# Altium PCB Backplane.PcbDoc (part 3 of 3)
Units mil, origin at the board's own origin, x right, y up, seen from the top; angles counter-clockwise.
Board outline 16600 x 5110.24 mil, 4 copper layers (Component Side, Signal Layer 2, Signal Layer 1, Solder Side), stack 33.234 mil thick; 44 components, 199 nets, 1072 pads, 16 vias.
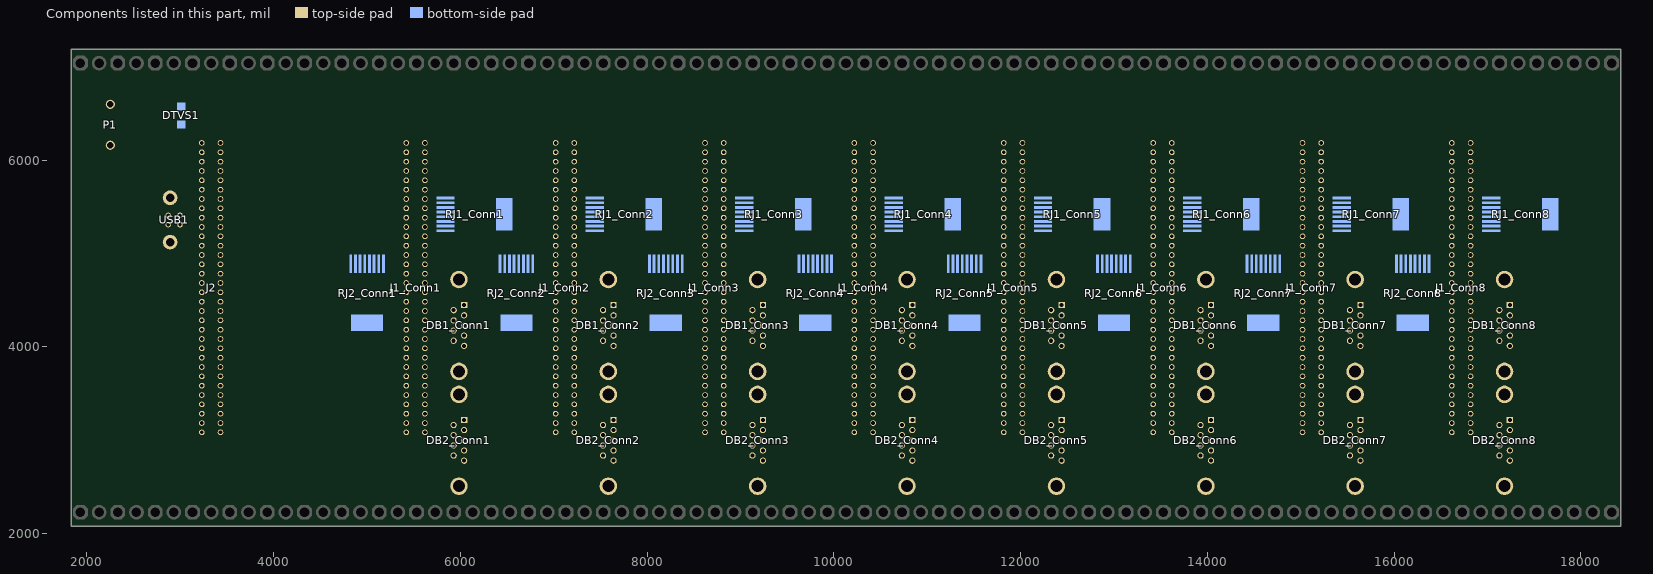
[diagram p5: the components of this part, seen from the top]

## Polygon pours and split planes (outlines as drawn) (continued)
+5VB_Conn8 on Component Side "Component Side-No Net 2" (solid, pour order 3671): 16547.88,4045.32 16897.88,4045.32 16967.88,4115.31 16967.88,4345.31 17067.88,4445.31 17187.88,4445.31 17187.88,4275.31 17287.88,4275.31 17287.88,4505.31 16957.88,4505.31 16887.88,4435.31 16877.88,4425.31 16877.88,4235.31 16547.88,4235.31
+5VGNDB_Conn8 on Component Side "Component Side-No Net 2" (solid, pour order 3691): 16547.88,3835.32 16887.88,3835.31 17067.88,4015.32 17067.88,4235.31 17177.88,4235.31 17177.88,4435.31 17077.88,4435.31 16977.88,4335.31 16977.88,4105.32 16907.88,4035.32 16547.88,4035.32
-5VGNDB_Conn8 on Component Side "Component Side-No Net 2" (solid, pour order 3644): 17077.88,4225.31 17177.88,4225.31 17177.88,3995.32 16917.88,3735.32 16547.88,3735.32 16547.88,3825.31 16897.88,3825.31 17077.88,4005.32
-5VB_Conn8 on Component Side "-5VB_CONN8_L01_P3650" (solid, pour order 3650): 17187.88,4165.31 17287.88,4165.31 17287.88,3965.32 16957.88,3635.32 16547.88,3635.32 16547.88,3725.32 16927.88,3725.32 17187.88,3985.32
-5VA_Conn8 on Component Side "Component Side-No Net 2" (solid, pour order 3655): 16547.88,3035.32 16787.88,3035.32 16977.88,2845.32 16977.88,2705.32 17027.88,2655.31 17307.88,2655.32 17307.88,2940.31 17307.88,2945.31 17188.16,2945.31 17187.88,2735.32 17067.88,2735.32 17067.61,2895.59 16837.88,3125.31 16548.2,3125.31
+5VA_Conn8 on Component Side "Component Side-No Net 2" (solid, pour order 3678): 17187.88,3045.32 17287.88,3045.32 17287.88,3235.32 17057.88,3465.32 16907.88,3615.32 16547.88,3615.32 16547.88,3435.32 16897.88,3435.31 17187.88,3145.31
+5VGNDA_Conn8 on Component Side "Component Side-No Net 2" (solid, pour order 3661): 17177.88,3015.32 17177.88,3135.32 16887.88,3425.32 16547.88,3425.31 16547.88,3245.31 16867.88,3245.32 17097.88,3015.32
-5VGNDA_Conn8 on Component Side "Component Side-No Net 2" (solid, pour order 3633): 17177.88,2765.32 17077.88,2765.31 17077.88,2905.32 17027.88,2955.32 16847.88,3135.32 16547.88,3135.31 16547.88,3225.31 16857.88,3225.32 17077.88,3005.32 17087.88,2995.32 17177.88,2995.32
+5VB_Conn7 on Component Side "Component Side-No Net 2" (solid, pour order 3670): 14947.88,4045.32 15297.88,4045.32 15367.88,4115.31 15367.88,4345.31 15467.88,4445.31 15587.88,4445.31 15587.88,4275.31 15687.88,4275.31 15687.88,4505.31 15357.88,4505.31 15287.88,4435.31 15277.88,4425.31 15277.88,4235.31 14947.88,4235.31
+5VGNDB_Conn7 on Component Side "Component Side-No Net 2" (solid, pour order 3685): 14947.88,3835.32 15287.88,3835.31 15467.88,4015.32 15467.88,4235.31 15577.88,4235.31 15577.88,4435.31 15477.88,4435.31 15377.88,4335.31 15377.88,4105.32 15307.88,4035.32 14947.88,4035.32
-5VGNDB_Conn7 on Component Side "Component Side-No Net 2" (solid, pour order 3639): 15477.88,4225.31 15577.88,4225.31 15577.88,3995.32 15317.88,3735.32 14947.88,3735.32 14947.88,3825.31 15297.88,3825.31 15477.88,4005.32
-5VB_Conn7 on Component Side "Component Side-No Net 2" (solid, pour order 3649): 15587.88,4165.31 15687.88,4165.31 15687.88,3965.32 15357.88,3635.32 14947.88,3635.32 14947.88,3725.32 15327.88,3725.32 15587.88,3985.32
-5VA_Conn7 on Component Side "Component Side-No Net 2" (solid, pour order 3654): 14947.88,3035.32 15187.88,3035.32 15377.88,2845.32 15377.88,2705.32 15427.88,2655.31 15707.88,2655.32 15707.88,2940.31 15707.88,2945.31 15588.16,2945.31 15587.88,2735.32 15467.88,2735.32 15467.61,2895.59 15237.88,3125.31 14948.2,3125.31
+5VA_Conn7 on Component Side "Component Side-No Net 2" (solid, pour order 3679): 15587.88,3045.32 15687.88,3045.32 15687.88,3235.32 15457.88,3465.32 15307.88,3615.32 14947.88,3615.32 14947.88,3435.32 15297.88,3435.31 15587.88,3145.31
+5VGNDA_Conn7 on Component Side "Component Side-No Net 2" (solid, pour order 3665): 15577.88,3015.32 15577.88,3135.32 15287.88,3425.32 14947.88,3425.31 14947.88,3245.31 15267.88,3245.32 15497.88,3015.32
-5VGNDA_Conn7 on Component Side "Component Side-No Net 2" (solid, pour order 3631): 15577.88,2765.32 15477.88,2765.31 15477.88,2905.32 15427.88,2955.32 15247.88,3135.32 14947.88,3135.31 14947.88,3225.31 15257.88,3225.32 15477.88,3005.32 15487.88,2995.32 15577.88,2995.32
+5VB_Conn6 on Component Side "Component Side-No Net 2" (solid, pour order 3673): 13347.88,4045.32 13697.88,4045.32 13767.88,4115.31 13767.88,4345.31 13867.88,4445.31 13987.88,4445.31 13987.88,4275.31 14087.88,4275.31 14087.88,4505.31 13757.88,4505.31 13687.88,4435.31 13677.88,4425.31 13677.88,4235.31 13347.88,4235.31
+5VGNDB_Conn6 on Component Side "Component Side-No Net 2" (solid, pour order 3692): 13347.88,3835.32 13687.88,3835.31 13867.88,4015.32 13867.88,4235.31 13977.88,4235.31 13977.88,4435.31 13877.88,4435.31 13777.88,4335.31 13777.88,4105.32 13707.88,4035.32 13347.88,4035.32
-5VGNDB_Conn6 on Component Side "Component Side-No Net 2" (solid, pour order 3640): 13877.88,4225.31 13977.88,4225.31 13977.88,3995.32 13717.88,3735.32 13347.88,3735.32 13347.88,3825.31 13697.88,3825.31 13877.88,4005.32
-5VB_Conn6 on Component Side "-5VB_CONN6_L01_P3645" (solid, pour order 3645): 13987.88,4165.31 14087.88,4165.31 14087.88,3965.32 13757.88,3635.32 13347.88,3635.32 13347.88,3725.32 13727.88,3725.32 13987.88,3985.32
-5VA_Conn6 on Component Side "Component Side-No Net 2" (solid, pour order 3653): 13347.88,3035.32 13587.88,3035.32 13777.88,2845.32 13777.88,2705.32 13827.88,2655.31 14107.88,2655.32 14107.88,2940.31 14107.88,2945.31 13988.16,2945.31 13987.88,2735.32 13867.88,2735.32 13867.61,2895.59 13637.88,3125.31 13348.2,3125.31
+5VA_Conn6 on Component Side "Component Side-No Net 2" (solid, pour order 3684): 13987.88,3045.32 14087.88,3045.32 14087.88,3235.32 13857.88,3465.32 13707.88,3615.32 13347.88,3615.32 13347.88,3435.32 13697.88,3435.31 13987.88,3145.31
+5VGNDA_Conn6 on Component Side "Component Side-No Net 2" (solid, pour order 3663): 13977.88,3015.32 13977.88,3135.32 13687.88,3425.32 13347.88,3425.31 13347.88,3245.31 13667.88,3245.32 13897.88,3015.32
-5VGNDA_Conn6 on Component Side "Component Side-No Net 2" (solid, pour order 3629): 13977.88,2765.32 13877.88,2765.31 13877.88,2905.32 13827.88,2955.32 13647.88,3135.32 13347.88,3135.31 13347.88,3225.31 13657.88,3225.32 13877.88,3005.32 13887.88,2995.32 13977.88,2995.32
+5VB_Conn5 on Component Side "Component Side-No Net 2" (solid, pour order 3675): 11747.88,4045.32 12097.88,4045.32 12167.88,4115.31 12167.88,4345.31 12267.88,4445.31 12387.88,4445.31 12387.88,4275.31 12487.88,4275.31 12487.88,4505.31 12157.88,4505.31 12087.88,4435.31 12077.88,4425.31 12077.88,4235.31 11747.88,4235.31
+5VGNDB_Conn5 on Component Side "Component Side-No Net 2" (solid, pour order 3689): 11747.88,3835.32 12087.88,3835.31 12267.88,4015.32 12267.88,4235.31 12377.88,4235.31 12377.88,4435.31 12277.88,4435.31 12177.88,4335.31 12177.88,4105.32 12107.88,4035.32 11747.88,4035.32
-5VGNDB_Conn5 on Component Side "Component Side-No Net 2" (solid, pour order 3638): 12277.88,4225.31 12377.88,4225.31 12377.88,3995.32 12117.88,3735.32 11747.88,3735.32 11747.88,3825.31 12097.88,3825.31 12277.88,4005.32
-5VB_Conn5 on Component Side "-5VB_CONN5_L01_P3646" (solid, pour order 3646): 12387.88,4165.31 12487.88,4165.31 12487.88,3965.32 12157.88,3635.32 11747.88,3635.32 11747.88,3725.32 12127.88,3725.32 12387.88,3985.32
-5VA_Conn5 on Component Side "Component Side-No Net 2" (solid, pour order 3656): 11747.88,3035.32 11987.88,3035.32 12177.88,2845.32 12177.88,2705.32 12227.88,2655.31 12507.88,2655.32 12507.88,2940.31 12507.88,2945.31 12388.16,2945.31 12387.88,2735.32 12267.88,2735.32 12267.61,2895.59 12037.88,3125.31 11748.2,3125.31
+5VA_Conn5 on Component Side "Component Side-No Net 2" (solid, pour order 3683): 12387.88,3045.32 12487.88,3045.32 12487.88,3235.32 12257.88,3465.32 12107.88,3615.32 11747.88,3615.32 11747.88,3435.32 12097.88,3435.31 12387.88,3145.31
+5VGNDA_Conn5 on Component Side "Component Side-No Net 2" (solid, pour order 3666): 12377.88,3015.32 12377.88,3135.32 12087.88,3425.32 11747.88,3425.31 11747.88,3245.31 12067.88,3245.32 12297.88,3015.32
-5VGNDA_Conn5 on Component Side "Component Side-No Net 2" (solid, pour order 3634): 12377.88,2765.32 12277.88,2765.31 12277.88,2905.32 12227.88,2955.32 12047.88,3135.32 11747.88,3135.31 11747.88,3225.31 12057.88,3225.32 12277.88,3005.32 12287.88,2995.32 12377.88,2995.32
+5VB_Conn4 on Component Side "Component Side-No Net 2" (solid, pour order 3672): 10147.88,4045.32 10497.88,4045.32 10567.88,4115.31 10567.88,4345.31 10667.88,4445.31 10787.88,4445.31 10787.88,4275.31 10887.88,4275.31 10887.88,4505.31 10557.88,4505.31 10487.88,4435.31 10477.88,4425.31 10477.88,4235.31 10147.88,4235.31
+5VGNDB_Conn4 on Component Side "Component Side-No Net 2" (solid, pour order 3690): 10147.88,3835.32 10487.88,3835.31 10667.88,4015.32 10667.88,4235.31 10777.88,4235.31 10777.88,4435.31 10677.88,4435.31 10577.88,4335.31 10577.88,4105.32 10507.88,4035.32 10147.88,4035.32
-5VGNDB_Conn4 on Component Side "Component Side-No Net 2" (solid, pour order 3641): 10677.88,4225.31 10777.88,4225.31 10777.88,3995.32 10517.88,3735.32 10147.88,3735.32 10147.88,3825.31 10497.88,3825.31 10677.88,4005.32
-5VB_Conn4 on Component Side "Component Side-No Net 2" (solid, pour order 3648): 10787.88,4165.31 10887.88,4165.31 10887.88,3965.32 10557.88,3635.32 10147.88,3635.32 10147.88,3725.32 10527.88,3725.32 10787.88,3985.32
-5VA_Conn4 on Component Side "Component Side-No Net 2" (solid, pour order 3658): 10147.88,3035.32 10387.88,3035.32 10577.88,2845.32 10577.88,2705.32 10627.88,2655.31 10907.88,2655.32 10907.88,2940.31 10907.88,2945.31 10788.16,2945.31 10787.88,2735.32 10667.88,2735.32 10667.61,2895.59 10437.88,3125.31 10148.2,3125.31
+5VA_Conn4 on Component Side "Component Side-No Net 2" (solid, pour order 3680): 10787.88,3045.32 10887.88,3045.32 10887.88,3235.32 10657.88,3465.32 10507.88,3615.32 10147.88,3615.32 10147.88,3435.32 10497.88,3435.31 10787.88,3145.31
+5VGNDA_Conn4 on Component Side "Component Side-No Net 2" (solid, pour order 3667): 10777.88,3015.32 10777.88,3135.32 10487.88,3425.32 10147.88,3425.31 10147.88,3245.31 10467.88,3245.32 10697.88,3015.32
-5VGNDA_Conn4 on Component Side "Component Side-No Net 2" (solid, pour order 3630): 10777.88,2765.32 10677.88,2765.31 10677.88,2905.32 10627.88,2955.32 10447.88,3135.32 10147.88,3135.31 10147.88,3225.31 10457.88,3225.32 10677.88,3005.32 10687.88,2995.32 10777.88,2995.32
+5VB_Conn3 on Component Side "+5VB_CONN3_L01_P3669" (solid, pour order 3669): 8547.88,4045.32 8897.88,4045.32 8967.88,4115.31 8967.88,4345.31 9067.88,4445.31 9187.88,4445.31 9187.88,4275.31 9287.88,4275.31 9287.88,4505.31 8957.88,4505.31 8887.88,4435.31 8877.88,4425.31 8877.88,4235.31 8547.88,4235.31
+5VGNDB_Conn3 on Component Side "Component Side-No Net 2" (solid, pour order 3687): 8547.88,3835.32 8887.88,3835.31 9067.88,4015.32 9067.88,4235.31 9177.88,4235.31 9177.88,4435.31 9077.88,4435.31 8977.88,4335.31 8977.88,4105.32 8907.88,4035.32 8547.88,4035.32
-5VGNDB_Conn3 on Component Side "Component Side-No Net 2" (solid, pour order 3643): 9077.88,4225.31 9177.88,4225.31 9177.88,3995.32 8917.88,3735.32 8547.88,3735.32 8547.88,3825.31 8897.88,3825.31 9077.88,4005.32
-5VB_Conn3 on Component Side "Component Side-No Net 2" (solid, pour order 3651): 9187.88,4165.31 9287.88,4165.31 9287.88,3965.32 8957.88,3635.32 8547.88,3635.32 8547.88,3725.32 8927.88,3725.32 9187.88,3985.32
-5VA_Conn3 on Component Side "Component Side-No Net 2" (solid, pour order 3657): 8547.88,3035.32 8787.88,3035.32 8977.88,2845.32 8977.88,2705.32 9027.88,2655.31 9307.88,2655.32 9307.88,2940.31 9307.88,2945.31 9188.16,2945.31 9187.88,2735.32 9067.88,2735.32 9067.61,2895.59 8837.88,3125.31 8548.2,3125.31
+5VA_Conn3 on Component Side "Component Side-No Net 2" (solid, pour order 3677): 9187.88,3045.32 9287.88,3045.32 9287.88,3235.32 9057.88,3465.32 8907.88,3615.32 8547.88,3615.32 8547.88,3435.32 8897.88,3435.31 9187.88,3145.31
+5VGNDA_Conn3 on Component Side "Component Side-No Net 2" (solid, pour order 3668): 9177.88,3015.32 9177.88,3135.32 8887.88,3425.32 8547.88,3425.31 8547.88,3245.31 8867.88,3245.32 9097.88,3015.32
-5VGNDA_Conn3 on Component Side "Component Side-No Net 2" (solid, pour order 3636): 9177.88,2765.32 9077.88,2765.31 9077.88,2905.32 9027.88,2955.32 8847.88,3135.32 8547.88,3135.31 8547.88,3225.31 8857.88,3225.32 9077.88,3005.32 9087.88,2995.32 9177.88,2995.32
-5VGNDA_Conn2 on Component Side "Component Side-No Net 2" (solid, pour order 3632): 7587.88,2765.32 7487.88,2765.31 7487.88,2905.32 7437.88,2955.32 7257.88,3135.32 6957.88,3135.31 6957.88,3225.31 7267.88,3225.32 7487.88,3005.32 7497.88,2995.32 7587.88,2995.32
+5VGNDA_Conn2 on Component Side "Component Side-No Net 2" (solid, pour order 3662): 7587.88,3015.32 7587.88,3135.32 7297.88,3425.32 6957.88,3425.31 6957.88,3245.31 7277.88,3245.32 7507.88,3015.32
+5VA_Conn2 on Component Side "Component Side-No Net 2" (solid, pour order 3682): 7597.88,3045.32 7697.88,3045.32 7697.88,3235.32 7467.88,3465.32 7317.88,3615.32 6957.88,3615.32 6957.88,3435.32 7307.88,3435.31 7597.88,3145.31
-5VA_Conn2 on Component Side "Component Side-No Net 2" (solid, pour order 3659): 6957.88,3035.32 7197.88,3035.32 7387.88,2845.32 7387.88,2705.32 7437.88,2655.31 7717.88,2655.32 7717.88,2940.31 7717.88,2945.31 7598.16,2945.31 7597.88,2735.32 7477.88,2735.32 7477.61,2895.59 7247.88,3125.31 6958.2,3125.31
-5VB_Conn2 on Component Side "Component Side-No Net 2" (solid, pour order 3647): 7597.88,4165.31 7697.88,4165.31 7697.88,3965.32 7367.88,3635.32 6957.88,3635.32 6957.88,3725.32 7337.88,3725.32 7597.88,3985.32
-5VGNDB_Conn2 on Component Side "Component Side-No Net 2" (solid, pour order 3642): 7487.88,4225.31 7587.88,4225.31 7587.88,3995.32 7327.88,3735.32 6957.88,3735.32 6957.88,3825.31 7307.88,3825.31 7487.88,4005.32
+5VGNDB_Conn2 on Component Side "Component Side-No Net 2" (solid, pour order 3686): 6957.88,3835.32 7297.88,3835.31 7477.88,4015.32 7477.88,4235.31 7587.88,4235.31 7587.88,4435.31 7487.88,4435.31 7387.88,4335.31 7387.88,4105.32 7317.88,4035.32 6957.88,4035.32
+5VB_Conn2 on Component Side "Component Side-No Net 2" (solid, pour order 3676): 6957.88,4045.32 7307.88,4045.32 7377.88,4115.31 7377.88,4345.31 7477.88,4445.31 7597.88,4445.31 7597.88,4275.31 7697.88,4275.31 7697.88,4505.31 7367.88,4505.31 7297.88,4435.31 7287.88,4425.31 7287.88,4235.31 6957.88,4235.31
+9V on Component Side "Component Side-No Net 2" (solid, pour order 3693): 3150,6030 16880,6030 16880,5940 3150,5940
36V on Component Side "Component Side-No Net 2" (solid, pour order 3694): 2580,6500 16880,6500 16880,6040 2580,6040
+5VB_Conn1 on Component Side "Component Side-No Net 2" (solid, pour order 3674): 5350,4050 5700,4050 5770,4120 5770,4350 5870,4450 5990,4450 5990,4280 6090,4280 6090,4510 5760,4510 5690,4440 5680,4430 5680,4240 5350,4240
+5VGNDB_Conn1 on Component Side "Component Side-No Net 2" (solid, pour order 3688): 5350,3840 5690,3840 5870,4020 5870,4240 5980,4240 5980,4440 5880,4440 5780,4340 5780,4110 5710,4040 5350,4040
-5VGNDB_Conn1 on Component Side "Component Side-No Net 2" (solid, pour order 3637): 5880,4230 5980,4230 5980,4000 5720,3740 5350,3740 5350,3830 5700,3830 5880,4010
-5VB_Conn1 on Component Side "Component Side-No Net 2" (solid, pour order 3652): 5990,4170 6090,4170 6090,3970 5760,3640 5350,3640 5350,3730 5730,3730 5990,3990
-5VA_Conn1 on Component Side "Component Side-No Net 2" (solid, pour order 3660): 5350,3040 5590,3040 5780,2850 5780,2710 5830,2660 6110,2660 6110,2945 6110,2950 5990.28,2950 5990,2740 5870,2740 5869.72,2900.28 5640,3130 5350.32,3130
+5VA_Conn1 on Component Side "Component Side-No Net 2" (solid, pour order 3681): 5990,3050 6090,3050 6090,3240 5860,3470 5710,3620 5350,3620 5350,3440 5700,3440 5990,3150
+5VGNDA_Conn1 on Component Side "Component Side-No Net 2" (solid, pour order 3664): 5980,3020 5980,3140 5690,3430 5350,3430 5350,3250 5670,3250 5900,3020
-5VGNDA_Conn1 on Component Side "Component Side-No Net 2" (solid, pour order 3635): 5980,2770 5880,2770 5880,2910 5830,2960 5650,3140 5350,3140 5350,3230 5660,3230 5880,3010 5890,3000 5980,3000
+5VB_Conn2 on Signal Layer 2 "Component Side-No Net 2" (solid, pour order 3813): 6957.88,4045.32 7307.88,4045.32 7377.88,4115.31 7377.88,4345.31 7477.88,4445.31 7597.88,4445.31 7597.88,4275.31 7697.88,4275.31 7697.88,4505.31 7367.88,4505.31 7297.88,4435.31 7287.88,4425.31 7287.88,4235.31 6957.88,4235.31
+5VGNDB_Conn2 on Signal Layer 2 "Component Side-No Net 2" (solid, pour order 3823): 6957.88,3835.32 7297.88,3835.31 7477.88,4015.32 7477.88,4235.31 7587.88,4235.31 7587.88,4435.31 7487.88,4435.31 7387.88,4335.31 7387.88,4105.32 7317.88,4035.32 6957.88,4035.32
-5VGNDB_Conn2 on Signal Layer 2 "Component Side-No Net 2" (solid, pour order 3776): 7487.88,4225.31 7587.88,4225.31 7587.88,3995.32 7327.88,3735.32 6957.88,3735.32 6957.88,3825.31 7307.88,3825.31 7487.88,4005.32
-5VB_Conn2 on Signal Layer 2 "Component Side-No Net 2" (solid, pour order 3782): 7597.88,4165.31 7697.88,4165.31 7697.88,3965.32 7367.88,3635.32 6957.88,3635.32 6957.88,3725.32 7337.88,3725.32 7597.88,3985.32
-5VA_Conn2 on Signal Layer 2 "Component Side-No Net 2" (solid, pour order 3790): 6957.88,3035.32 7197.88,3035.32 7387.88,2845.32 7387.88,2705.32 7437.88,2655.31 7717.88,2655.32 7717.88,2940.31 7717.88,2945.31 7598.16,2945.31 7597.88,2735.32 7477.88,2735.32 7477.61,2895.59 7247.88,3125.31 6958.2,3125.31
+5VA_Conn2 on Signal Layer 2 "Component Side-No Net 2" (solid, pour order 3821): 7597.88,3045.32 7697.88,3045.32 7697.88,3235.32 7467.88,3465.32 7317.88,3615.32 6957.88,3615.32 6957.88,3435.32 7307.88,3435.31 7597.88,3145.31
+5VGNDA_Conn2 on Signal Layer 2 "Component Side-No Net 2" (solid, pour order 3803): 7587.88,3015.32 7587.88,3135.32 7297.88,3425.32 6957.88,3425.31 6957.88,3245.31 7277.88,3245.32 7507.88,3015.32
-5VGNDA_Conn2 on Signal Layer 2 "Component Side-No Net 2" (solid, pour order 3760): 7587.88,2765.32 7487.88,2765.31 7487.88,2905.32 7437.88,2955.32 7257.88,3135.32 6957.88,3135.31 6957.88,3225.31 7267.88,3225.32 7487.88,3005.32 7497.88,2995.32 7587.88,2995.32
-5VGNDA_Conn3 on Signal Layer 2 "Component Side-No Net 2" (solid, pour order 3763): 9177.88,2765.32 9077.88,2765.31 9077.88,2905.32 9027.88,2955.32 8847.88,3135.32 8547.88,3135.31 8547.88,3225.31 8857.88,3225.32 9077.88,3005.32 9087.88,2995.32 9177.88,2995.32
+5VGNDA_Conn3 on Signal Layer 2 "Component Side-No Net 2" (solid, pour order 3802): 9177.88,3015.32 9177.88,3135.32 8887.88,3425.32 8547.88,3425.31 8547.88,3245.31 8867.88,3245.32 9097.88,3015.32
+5VA_Conn3 on Signal Layer 2 "Component Side-No Net 2" (solid, pour order 3817): 9187.88,3045.32 9287.88,3045.32 9287.88,3235.32 9057.88,3465.32 8907.88,3615.32 8547.88,3615.32 8547.88,3435.32 8897.88,3435.31 9187.88,3145.31
-5VA_Conn3 on Signal Layer 2 "Component Side-No Net 2" (solid, pour order 3795): 8547.88,3035.32 8787.88,3035.32 8977.88,2845.32 8977.88,2705.32 9027.88,2655.31 9307.88,2655.32 9307.88,2940.31 9307.88,2945.31 9188.16,2945.31 9187.88,2735.32 9067.88,2735.32 9067.61,2895.59 8837.88,3125.31 8548.2,3125.31
-5VB_Conn3 on Signal Layer 2 "Component Side-No Net 2" (solid, pour order 3786): 9187.88,4165.31 9287.88,4165.31 9287.88,3965.32 8957.88,3635.32 8547.88,3635.32 8547.88,3725.32 8927.88,3725.32 9187.88,3985.32
-5VGNDB_Conn3 on Signal Layer 2 "Component Side-No Net 2" (solid, pour order 3775): 9077.88,4225.31 9177.88,4225.31 9177.88,3995.32 8917.88,3735.32 8547.88,3735.32 8547.88,3825.31 8897.88,3825.31 9077.88,4005.32
+5VGNDB_Conn3 on Signal Layer 2 "Component Side-No Net 2" (solid, pour order 3826): 8547.88,3835.32 8887.88,3835.31 9067.88,4015.32 9067.88,4235.31 9177.88,4235.31 9177.88,4435.31 9077.88,4435.31 8977.88,4335.31 8977.88,4105.32 8907.88,4035.32 8547.88,4035.32
+5VB_Conn3 on Signal Layer 2 "+5VB_CONN3_L02_P3808" (solid, pour order 3808): 8547.88,4045.32 8897.88,4045.32 8967.88,4115.31 8967.88,4345.31 9067.88,4445.31 9187.88,4445.31 9187.88,4275.31 9287.88,4275.31 9287.88,4505.31 8957.88,4505.31 8887.88,4435.31 8877.88,4425.31 8877.88,4235.31 8547.88,4235.31
-5VGNDA_Conn4 on Signal Layer 2 "Component Side-No Net 2" (solid, pour order 3762): 10777.88,2765.32 10677.88,2765.31 10677.88,2905.32 10627.88,2955.32 10447.88,3135.32 10147.88,3135.31 10147.88,3225.31 10457.88,3225.32 10677.88,3005.32 10687.88,2995.32 10777.88,2995.32
+5VGNDA_Conn4 on Signal Layer 2 "Component Side-No Net 2" (solid, pour order 3804): 10777.88,3015.32 10777.88,3135.32 10487.88,3425.32 10147.88,3425.31 10147.88,3245.31 10467.88,3245.32 10697.88,3015.32
+5VA_Conn4 on Signal Layer 2 "Component Side-No Net 2" (solid, pour order 3814): 10787.88,3045.32 10887.88,3045.32 10887.88,3235.32 10657.88,3465.32 10507.88,3615.32 10147.88,3615.32 10147.88,3435.32 10497.88,3435.31 10787.88,3145.31
-5VA_Conn4 on Signal Layer 2 "Component Side-No Net 2" (solid, pour order 3793): 10147.88,3035.32 10387.88,3035.32 10577.88,2845.32 10577.88,2705.32 10627.88,2655.31 10907.88,2655.32 10907.88,2940.31 10907.88,2945.31 10788.16,2945.31 10787.88,2735.32 10667.88,2735.32 10667.61,2895.59 10437.88,3125.31 10148.2,3125.31
-5VB_Conn4 on Signal Layer 2 "Component Side-No Net 2" (solid, pour order 3784): 10787.88,4165.31 10887.88,4165.31 10887.88,3965.32 10557.88,3635.32 10147.88,3635.32 10147.88,3725.32 10527.88,3725.32 10787.88,3985.32
-5VGNDB_Conn4 on Signal Layer 2 "Component Side-No Net 2" (solid, pour order 3773): 10677.88,4225.31 10777.88,4225.31 10777.88,3995.32 10517.88,3735.32 10147.88,3735.32 10147.88,3825.31 10497.88,3825.31 10677.88,4005.32
+5VGNDB_Conn4 on Signal Layer 2 "Component Side-No Net 2" (solid, pour order 3830): 10147.88,3835.32 10487.88,3835.31 10667.88,4015.32 10667.88,4235.31 10777.88,4235.31 10777.88,4435.31 10677.88,4435.31 10577.88,4335.31 10577.88,4105.32 10507.88,4035.32 10147.88,4035.32
+5VB_Conn4 on Signal Layer 2 "Component Side-No Net 2" (solid, pour order 3812): 10147.88,4045.32 10497.88,4045.32 10567.88,4115.31 10567.88,4345.31 10667.88,4445.31 10787.88,4445.31 10787.88,4275.31 10887.88,4275.31 10887.88,4505.31 10557.88,4505.31 10487.88,4435.31 10477.88,4425.31 10477.88,4235.31 10147.88,4235.31
-5VGNDA_Conn5 on Signal Layer 2 "Component Side-No Net 2" (solid, pour order 3761): 12377.88,2765.32 12277.88,2765.31 12277.88,2905.32 12227.88,2955.32 12047.88,3135.32 11747.88,3135.31 11747.88,3225.31 12057.88,3225.32 12277.88,3005.32 12287.88,2995.32 12377.88,2995.32
+5VGNDA_Conn5 on Signal Layer 2 "Component Side-No Net 2" (solid, pour order 3799): 12377.88,3015.32 12377.88,3135.32 12087.88,3425.32 11747.88,3425.31 11747.88,3245.31 12067.88,3245.32 12297.88,3015.32
+5VA_Conn5 on Signal Layer 2 "Component Side-No Net 2" (solid, pour order 3816): 12387.88,3045.32 12487.88,3045.32 12487.88,3235.32 12257.88,3465.32 12107.88,3615.32 11747.88,3615.32 11747.88,3435.32 12097.88,3435.31 12387.88,3145.31
-5VA_Conn5 on Signal Layer 2 "Component Side-No Net 2" (solid, pour order 3789): 11747.88,3035.32 11987.88,3035.32 12177.88,2845.32 12177.88,2705.32 12227.88,2655.31 12507.88,2655.32 12507.88,2940.31 12507.88,2945.31 12388.16,2945.31 12387.88,2735.32 12267.88,2735.32 12267.61,2895.59 12037.88,3125.31 11748.2,3125.31
-5VB_Conn5 on Signal Layer 2 "-5VB_CONN5_L02_P3785" (solid, pour order 3785): 12387.88,4165.31 12487.88,4165.31 12487.88,3965.32 12157.88,3635.32 11747.88,3635.32 11747.88,3725.32 12127.88,3725.32 12387.88,3985.32
-5VGNDB_Conn5 on Signal Layer 2 "Component Side-No Net 2" (solid, pour order 3777): 12277.88,4225.31 12377.88,4225.31 12377.88,3995.32 12117.88,3735.32 11747.88,3735.32 11747.88,3825.31 12097.88,3825.31 12277.88,4005.32
+5VGNDB_Conn5 on Signal Layer 2 "Component Side-No Net 2" (solid, pour order 3827): 11747.88,3835.32 12087.88,3835.31 12267.88,4015.32 12267.88,4235.31 12377.88,4235.31 12377.88,4435.31 12277.88,4435.31 12177.88,4335.31 12177.88,4105.32 12107.88,4035.32 11747.88,4035.32
+5VB_Conn5 on Signal Layer 2 "Component Side-No Net 2" (solid, pour order 3809): 11747.88,4045.32 12097.88,4045.32 12167.88,4115.31 12167.88,4345.31 12267.88,4445.31 12387.88,4445.31 12387.88,4275.31 12487.88,4275.31 12487.88,4505.31 12157.88,4505.31 12087.88,4435.31 12077.88,4425.31 12077.88,4235.31 11747.88,4235.31
-5VGNDA_Conn6 on Signal Layer 2 "Component Side-No Net 2" (solid, pour order 3767): 13977.88,2765.32 13877.88,2765.31 13877.88,2905.32 13827.88,2955.32 13647.88,3135.32 13347.88,3135.31 13347.88,3225.31 13657.88,3225.32 13877.88,3005.32 13887.88,2995.32 13977.88,2995.32
+5VGNDA_Conn6 on Signal Layer 2 "Component Side-No Net 2" (solid, pour order 3798): 13977.88,3015.32 13977.88,3135.32 13687.88,3425.32 13347.88,3425.31 13347.88,3245.31 13667.88,3245.32 13897.88,3015.32
+5VA_Conn6 on Signal Layer 2 "Component Side-No Net 2" (solid, pour order 3822): 13987.88,3045.32 14087.88,3045.32 14087.88,3235.32 13857.88,3465.32 13707.88,3615.32 13347.88,3615.32 13347.88,3435.32 13697.88,3435.31 13987.88,3145.31
-5VA_Conn6 on Signal Layer 2 "Component Side-No Net 2" (solid, pour order 3788): 13347.88,3035.32 13587.88,3035.32 13777.88,2845.32 13777.88,2705.32 13827.88,2655.31 14107.88,2655.32 14107.88,2940.31 14107.88,2945.31 13988.16,2945.31 13987.88,2735.32 13867.88,2735.32 13867.61,2895.59 13637.88,3125.31 13348.2,3125.31
-5VB_Conn6 on Signal Layer 2 "-5VB_CONN6_L02_P3778" (solid, pour order 3778): 13987.88,4165.31 14087.88,4165.31 14087.88,3965.32 13757.88,3635.32 13347.88,3635.32 13347.88,3725.32 13727.88,3725.32 13987.88,3985.32
-5VGNDB_Conn6 on Signal Layer 2 "Component Side-No Net 2" (solid, pour order 3774): 13877.88,4225.31 13977.88,4225.31 13977.88,3995.32 13717.88,3735.32 13347.88,3735.32 13347.88,3825.31 13697.88,3825.31 13877.88,4005.32
+5VGNDB_Conn6 on Signal Layer 2 "Component Side-No Net 2" (solid, pour order 3824): 13347.88,3835.32 13687.88,3835.31 13867.88,4015.32 13867.88,4235.31 13977.88,4235.31 13977.88,4435.31 13877.88,4435.31 13777.88,4335.31 13777.88,4105.32 13707.88,4035.32 13347.88,4035.32
+5VB_Conn6 on Signal Layer 2 "Component Side-No Net 2" (solid, pour order 3810): 13347.88,4045.32 13697.88,4045.32 13767.88,4115.31 13767.88,4345.31 13867.88,4445.31 13987.88,4445.31 13987.88,4275.31 14087.88,4275.31 14087.88,4505.31 13757.88,4505.31 13687.88,4435.31 13677.88,4425.31 13677.88,4235.31 13347.88,4235.31
-5VGNDA_Conn7 on Signal Layer 2 "Component Side-No Net 2" (solid, pour order 3764): 15577.88,2765.32 15477.88,2765.31 15477.88,2905.32 15427.88,2955.32 15247.88,3135.32 14947.88,3135.31 14947.88,3225.31 15257.88,3225.32 15477.88,3005.32 15487.88,2995.32 15577.88,2995.32
+5VGNDA_Conn7 on Signal Layer 2 "Component Side-No Net 2" (solid, pour order 3796): 15577.88,3015.32 15577.88,3135.32 15287.88,3425.32 14947.88,3425.31 14947.88,3245.31 15267.88,3245.32 15497.88,3015.32
+5VA_Conn7 on Signal Layer 2 "Component Side-No Net 2" (solid, pour order 3819): 15587.88,3045.32 15687.88,3045.32 15687.88,3235.32 15457.88,3465.32 15307.88,3615.32 14947.88,3615.32 14947.88,3435.32 15297.88,3435.31 15587.88,3145.31
-5VA_Conn7 on Signal Layer 2 "Component Side-No Net 2" (solid, pour order 3791): 14947.88,3035.32 15187.88,3035.32 15377.88,2845.32 15377.88,2705.32 15427.88,2655.31 15707.88,2655.32 15707.88,2940.31 15707.88,2945.31 15588.16,2945.31 15587.88,2735.32 15467.88,2735.32 15467.61,2895.59 15237.88,3125.31 14948.2,3125.31
-5VB_Conn7 on Signal Layer 2 "Component Side-No Net 2" (solid, pour order 3783): 15587.88,4165.31 15687.88,4165.31 15687.88,3965.32 15357.88,3635.32 14947.88,3635.32 14947.88,3725.32 15327.88,3725.32 15587.88,3985.32
-5VGNDB_Conn7 on Signal Layer 2 "Component Side-No Net 2" (solid, pour order 3771): 15477.88,4225.31 15577.88,4225.31 15577.88,3995.32 15317.88,3735.32 14947.88,3735.32 14947.88,3825.31 15297.88,3825.31 15477.88,4005.32
+5VGNDB_Conn7 on Signal Layer 2 "Component Side-No Net 2" (solid, pour order 3831): 14947.88,3835.32 15287.88,3835.31 15467.88,4015.32 15467.88,4235.31 15577.88,4235.31 15577.88,4435.31 15477.88,4435.31 15377.88,4335.31 15377.88,4105.32 15307.88,4035.32 14947.88,4035.32
+5VB_Conn7 on Signal Layer 2 "Component Side-No Net 2" (solid, pour order 3807): 14947.88,4045.32 15297.88,4045.32 15367.88,4115.31 15367.88,4345.31 15467.88,4445.31 15587.88,4445.31 15587.88,4275.31 15687.88,4275.31 15687.88,4505.31 15357.88,4505.31 15287.88,4435.31 15277.88,4425.31 15277.88,4235.31 14947.88,4235.31
-5VGNDA_Conn8 on Signal Layer 2 "Component Side-No Net 2" (solid, pour order 3765): 17177.88,2765.32 17077.88,2765.31 17077.88,2905.32 17027.88,2955.32 16847.88,3135.32 16547.88,3135.31 16547.88,3225.31 16857.88,3225.32 17077.88,3005.32 17087.88,2995.32 17177.88,2995.32
+5VGNDA_Conn8 on Signal Layer 2 "Component Side-No Net 2" (solid, pour order 3797): 17177.88,3015.32 17177.88,3135.32 16887.88,3425.32 16547.88,3425.31 16547.88,3245.31 16867.88,3245.32 17097.88,3015.32
+5VA_Conn8 on Signal Layer 2 "Component Side-No Net 2" (solid, pour order 3815): 17187.88,3045.32 17287.88,3045.32 17287.88,3235.32 17057.88,3465.32 16907.88,3615.32 16547.88,3615.32 16547.88,3435.32 16897.88,3435.31 17187.88,3145.31
-5VA_Conn8 on Signal Layer 2 "Component Side-No Net 2" (solid, pour order 3787): 16547.88,3035.32 16787.88,3035.32 16977.88,2845.32 16977.88,2705.32 17027.88,2655.31 17307.88,2655.32 17307.88,2940.31 17307.88,2945.31 17188.16,2945.31 17187.88,2735.32 17067.88,2735.32 17067.61,2895.59 16837.88,3125.31 16548.2,3125.31
-5VB_Conn8 on Signal Layer 2 "-5VB_CONN8_L02_P3779" (solid, pour order 3779): 17187.88,4165.31 17287.88,4165.31 17287.88,3965.32 16957.88,3635.32 16547.88,3635.32 16547.88,3725.32 16927.88,3725.32 17187.88,3985.32
-5VGNDB_Conn8 on Signal Layer 2 "Component Side-No Net 2" (solid, pour order 3769): 17077.88,4225.31 17177.88,4225.31 17177.88,3995.32 16917.88,3735.32 16547.88,3735.32 16547.88,3825.31 16897.88,3825.31 17077.88,4005.32
+5VGNDB_Conn8 on Signal Layer 2 "Component Side-No Net 2" (solid, pour order 3828): 16547.88,3835.32 16887.88,3835.31 17067.88,4015.32 17067.88,4235.31 17177.88,4235.31 17177.88,4435.31 17077.88,4435.31 16977.88,4335.31 16977.88,4105.32 16907.88,4035.32 16547.88,4035.32
+5VB_Conn8 on Signal Layer 2 "Component Side-No Net 2" (solid, pour order 3811): 16547.88,4045.32 16897.88,4045.32 16967.88,4115.31 16967.88,4345.31 17067.88,4445.31 17187.88,4445.31 17187.88,4275.31 17287.88,4275.31 17287.88,4505.31 16957.88,4505.31 16887.88,4435.31 16877.88,4425.31 16877.88,4235.31 16547.88,4235.31
-5VGNDA_Conn1 on Signal Layer 2 "Component Side-No Net 2" (solid, pour order 3768): 5980,2770 5880,2770 5880,2910 5830,2960 5650,3140 5350,3140 5350,3230 5660,3230 5880,3010 5890,3000 5980,3000
+5VGNDA_Conn1 on Signal Layer 2 "Component Side-No Net 2" (solid, pour order 3801): 5980,3020 5980,3140 5690,3430 5350,3430 5350,3250 5670,3250 5900,3020
+5VA_Conn1 on Signal Layer 2 "Component Side-No Net 2" (solid, pour order 3818): 5990,3050 6090,3050 6090,3240 5860,3470 5710,3620 5350,3620 5350,3440 5700,3440 5990,3150
-5VA_Conn1 on Signal Layer 2 "Component Side-No Net 2" (solid, pour order 3794): 5350,3040 5590,3040 5780,2850 5780,2710 5830,2660 6110,2660 6110,2945 6110,2950 5990.28,2950 5990,2740 5870,2740 5869.72,2900.28 5640,3130 5350.32,3130
-5VB_Conn1 on Signal Layer 2 "Component Side-No Net 2" (solid, pour order 3781): 5990,4170 6090,4170 6090,3970 5760,3640 5350,3640 5350,3730 5730,3730 5990,3990
-5VGNDB_Conn1 on Signal Layer 2 "Component Side-No Net 2" (solid, pour order 3770): 5880,4230 5980,4230 5980,4000 5720,3740 5350,3740 5350,3830 5700,3830 5880,4010
+5VGNDB_Conn1 on Signal Layer 2 "Component Side-No Net 2" (solid, pour order 3825): 5350,3840 5690,3840 5870,4020 5870,4240 5980,4240 5980,4440 5880,4440 5780,4340 5780,4110 5710,4040 5350,4040
+5VB_Conn1 on Signal Layer 2 "Component Side-No Net 2" (solid, pour order 3805): 5350,4050 5700,4050 5770,4120 5770,4350 5870,4450 5990,4450 5990,4280 6090,4280 6090,4510 5760,4510 5690,4440 5680,4430 5680,4240 5350,4240
+5VB_Conn1 on Signal Layer 2 "Component Side-No Net 2" (solid, pour order 3806): 5350,4050 5700,4050 5770,4120 5770,4350 5870,4450 5990,4450 5990,4280 6090,4280 6090,4510 5760,4510 5690,4440 5680,4430 5680,4240 5350,4240
+5VGNDB_Conn1 on Signal Layer 2 "Component Side-No Net 2" (solid, pour order 3829): 5350,3840 5690,3840 5870,4020 5870,4240 5980,4240 5980,4440 5880,4440 5780,4340 5780,4110 5710,4040 5350,4040
-5VGNDB_Conn1 on Signal Layer 2 "Component Side-No Net 2" (solid, pour order 3772): 5880,4230 5980,4230 5980,4000 5720,3740 5350,3740 5350,3830 5700,3830 5880,4010
-5VB_Conn1 on Signal Layer 2 "Component Side-No Net 2" (solid, pour order 3780): 5990,4170 6090,4170 6090,3970 5760,3640 5350,3640 5350,3730 5730,3730 5990,3990
-5VA_Conn1 on Signal Layer 2 "Component Side-No Net 2" (solid, pour order 3792): 5350,3040 5590,3040 5780,2850 5780,2710 5830,2660 6110,2660 6110,2945 6110,2950 5990.28,2950 5990,2740 5870,2740 5869.72,2900.28 5640,3130 5350.32,3130
+5VA_Conn1 on Signal Layer 2 "Component Side-No Net 2" (solid, pour order 3820): 5990,3050 6090,3050 6090,3240 5860,3470 5710,3620 5350,3620 5350,3440 5700,3440 5990,3150
+5VGNDA_Conn1 on Signal Layer 2 "Component Side-No Net 2" (solid, pour order 3800): 5980,3020 5980,3140 5690,3430 5350,3430 5350,3250 5670,3250 5900,3020
-5VGNDA_Conn1 on Signal Layer 2 "Component Side-No Net 2" (solid, pour order 3766): 5980,2770 5880,2770 5880,2910 5830,2960 5650,3140 5350,3140 5350,3230 5660,3230 5880,3010 5890,3000 5980,3000

## Other copper
Component Side:
  pour cut-out: 1996.69,2575.59 1996.69,2439.76 2285.28,2439.76 2285.28,2575.04
  text "1" at 2029.76,2477.56 h60
Signal Layer 1:
  pour cut-out: 1996.69,2575.59 1996.69,2439.76 2285.28,2439.76 2285.28,2575.04
  text "3" at 2180,2480 h60
Signal Layer 2:
  text "2" at 2070,2480 h60
Solder Side:
  pour cut-out: 1996.69,2575.59 1996.69,2439.76 2285.28,2439.76 2285.28,2575.04
  text "4" at 2250,2480 h60

## Silkscreen, mask and mechanical layers (free items; w line width, h text height)
Top Overlay:
  text "0x02" at 5430,6650.71 h60
  text "Controller" at 3080,6650 h60
  text "0x03" at 7040,6640.47 h60
  text "0x04" at 8620,6640.47 h60
  text "0x05" at 10230,6640.47 h60
  text "0x06" at 11820,6640.47 h60
  text "0x07" at 13420,6640.47 h60
  text "0x08" at 15030,6630.47 h60
  text "0x09" at 16620,6630.47 h60
Bottom Overlay:
  lines w10: 2510,2370 2530,2350 ; 2530,2460 2530,2350 ; 2710,2370 2730,2350 ; 2730,2460 2730,2350 ; 2530,2350 2550,2370 2530,2350 ; 2730,2350 2750,2370 2730,2350
  text "SCB" at 18030,5410 h78.74
  text "SCB" at 16410,5400 h78.74
  text "SCB" at 6810,5390 h78.74
  text "SCB" at 11620,5390 h78.74
  text "SCB" at 13230,5390 h78.74
  text "SCB" at 14810,5390 h78.74
  text "SCB" at 8430,5380 h78.74
  text "SCB" at 10030,5370 h78.74
  text "SCA" at 5110,5170 h78.74
  text "A" at 6210,4890 h60
  text "A" at 7810,4890 h60
  text "A" at 9410,4890 h60
  text "A" at 11010,4890 h60
  text "A" at 12610,4890 h60
  text "A" at 14210,4890 h60
  text "A" at 15810,4890 h60
  text "A" at 17410,4890 h60
  text "SCA" at 11510,4060 h78.74
  text "SCA" at 6690,4050 h78.74
  text "SCA" at 8300,4050 h78.74
  text "SCA" at 9910,4050 h78.74
  text "SCA" at 13120,4050 h78.74
  text "SCA" at 14710,4050 h78.74
  text "SCA" at 16300,4050 h78.74
  text "LVA" at 6520,3760 h78.74
  text "LVA" at 8120,3760 h78.74
  text "LVA" at 9720,3760 h78.74
  text "LVA" at 11320,3760 h78.74
  text "LVA" at 12920,3760 h78.74
  text "LVA" at 14520,3760 h78.74
  text "LVA" at 16120,3760 h78.74
  text "LVA" at 17720,3760 h78.74
  text "LVB" at 6500,2520 h78.74
  text "LVB" at 8100,2520 h78.74
  text "LVB" at 9700,2520 h78.74
  text "LVB" at 11300,2520 h78.74
  text "LVB" at 12900,2520 h78.74
  text "LVB" at 14500,2520 h78.74
  text "LVB" at 16100,2520 h78.74
  text "LVB" at 17690,2520 h78.74
  text "Ground" at 2500,2500 h60 r270
  text "Shield" at 2700,2500 h60 r270
Top Solder:
  rectangle: 1998.27,2441.73 2286.46,2575.98
Bottom Solder:
  rectangle: 1996.3,2440.55 2284.49,2574.8
Mechanical 1:
  the board outline again, w27.56

## Text inside footprints (layer, text, board x,y; h text height)
DB1_Conn1: Bottom Overlay "1" at 6175.94,4457.95 h59.06 r90; Bottom Overlay "5" at 6175.94,4031.57 h59.06 r90; Bottom Overlay "9" at 5885,4020 h59.06 r90; Bottom Overlay "6" at 5885,4470 h59.06 r90
DB1_Conn2: Bottom Overlay "1" at 7775.94,4457.95 h59.06 r90; Bottom Overlay "5" at 7775.94,4031.57 h59.06 r90; Bottom Overlay "9" at 7485,4020 h59.06 r90; Bottom Overlay "6" at 7485,4470 h59.06 r90
DB1_Conn3: Bottom Overlay "1" at 9375.94,4457.95 h59.06 r90; Bottom Overlay "5" at 9375.94,4031.57 h59.06 r90; Bottom Overlay "9" at 9085,4020 h59.06 r90; Bottom Overlay "6" at 9085,4470 h59.06 r90
DB1_Conn4: Bottom Overlay "1" at 10975.94,4457.95 h59.06 r90; Bottom Overlay "5" at 10975.94,4031.57 h59.06 r90; Bottom Overlay "9" at 10685,4020 h59.06 r90; Bottom Overlay "6" at 10685,4470 h59.06 r90
DB1_Conn5: Bottom Overlay "1" at 12575.94,4457.95 h59.06 r90; Bottom Overlay "5" at 12575.94,4031.57 h59.06 r90; Bottom Overlay "9" at 12285,4020 h59.06 r90; Bottom Overlay "6" at 12285,4470 h59.06 r90
DB1_Conn6: Bottom Overlay "1" at 14175.94,4457.95 h59.06 r90; Bottom Overlay "5" at 14175.94,4031.57 h59.06 r90; Bottom Overlay "9" at 13885,4020 h59.06 r90; Bottom Overlay "6" at 13885,4470 h59.06 r90
DB1_Conn7: Bottom Overlay "1" at 15775.94,4457.95 h59.06 r90; Bottom Overlay "5" at 15775.94,4031.57 h59.06 r90; Bottom Overlay "9" at 15485,4020 h59.06 r90; Bottom Overlay "6" at 15485,4470 h59.06 r90
DB1_Conn8: Bottom Overlay "1" at 17375.94,4457.95 h59.06 r90; Bottom Overlay "5" at 17375.94,4031.57 h59.06 r90; Bottom Overlay "9" at 17085,4020 h59.06 r90; Bottom Overlay "6" at 17085,4470 h59.06 r90
DB2_Conn1: Bottom Overlay "1" at 6175.94,3227.95 h59.06 r90; Bottom Overlay "5" at 6175.94,2801.57 h59.06 r90; Bottom Overlay "9" at 5885,2790 h59.06 r90; Bottom Overlay "6" at 5885,3240 h59.06 r90
DB2_Conn2: Bottom Overlay "1" at 7775.94,3227.95 h59.06 r90; Bottom Overlay "5" at 7775.94,2801.57 h59.06 r90; Bottom Overlay "9" at 7485,2790 h59.06 r90; Bottom Overlay "6" at 7485,3240 h59.06 r90
DB2_Conn3: Bottom Overlay "1" at 9375.94,3227.95 h59.06 r90; Bottom Overlay "5" at 9375.94,2801.57 h59.06 r90; Bottom Overlay "9" at 9085,2790 h59.06 r90; Bottom Overlay "6" at 9085,3240 h59.06 r90
DB2_Conn4: Bottom Overlay "1" at 10975.94,3227.95 h59.06 r90; Bottom Overlay "5" at 10975.94,2801.57 h59.06 r90; Bottom Overlay "9" at 10685,2790 h59.06 r90; Bottom Overlay "6" at 10685,3240 h59.06 r90
DB2_Conn5: Bottom Overlay "1" at 12575.94,3227.95 h59.06 r90; Bottom Overlay "5" at 12575.94,2801.57 h59.06 r90; Bottom Overlay "9" at 12285,2790 h59.06 r90; Bottom Overlay "6" at 12285,3240 h59.06 r90
DB2_Conn6: Bottom Overlay "1" at 14175.94,3227.95 h59.06 r90; Bottom Overlay "5" at 14175.94,2801.57 h59.06 r90; Bottom Overlay "9" at 13885,2790 h59.06 r90; Bottom Overlay "6" at 13885,3240 h59.06 r90
DB2_Conn7: Bottom Overlay "1" at 15775.94,3227.95 h59.06 r90; Bottom Overlay "5" at 15775.94,2801.57 h59.06 r90; Bottom Overlay "9" at 15485,2790 h59.06 r90; Bottom Overlay "6" at 15485,3240 h59.06 r90
DB2_Conn8: Bottom Overlay "1" at 17375.94,3227.95 h59.06 r90; Bottom Overlay "5" at 17375.94,2801.57 h59.06 r90; Bottom Overlay "9" at 17085,2790 h59.06 r90; Bottom Overlay "6" at 17085,3240 h59.06 r90